# EAGLE board robot workshop pcb final (EAGLE 6.6.0)
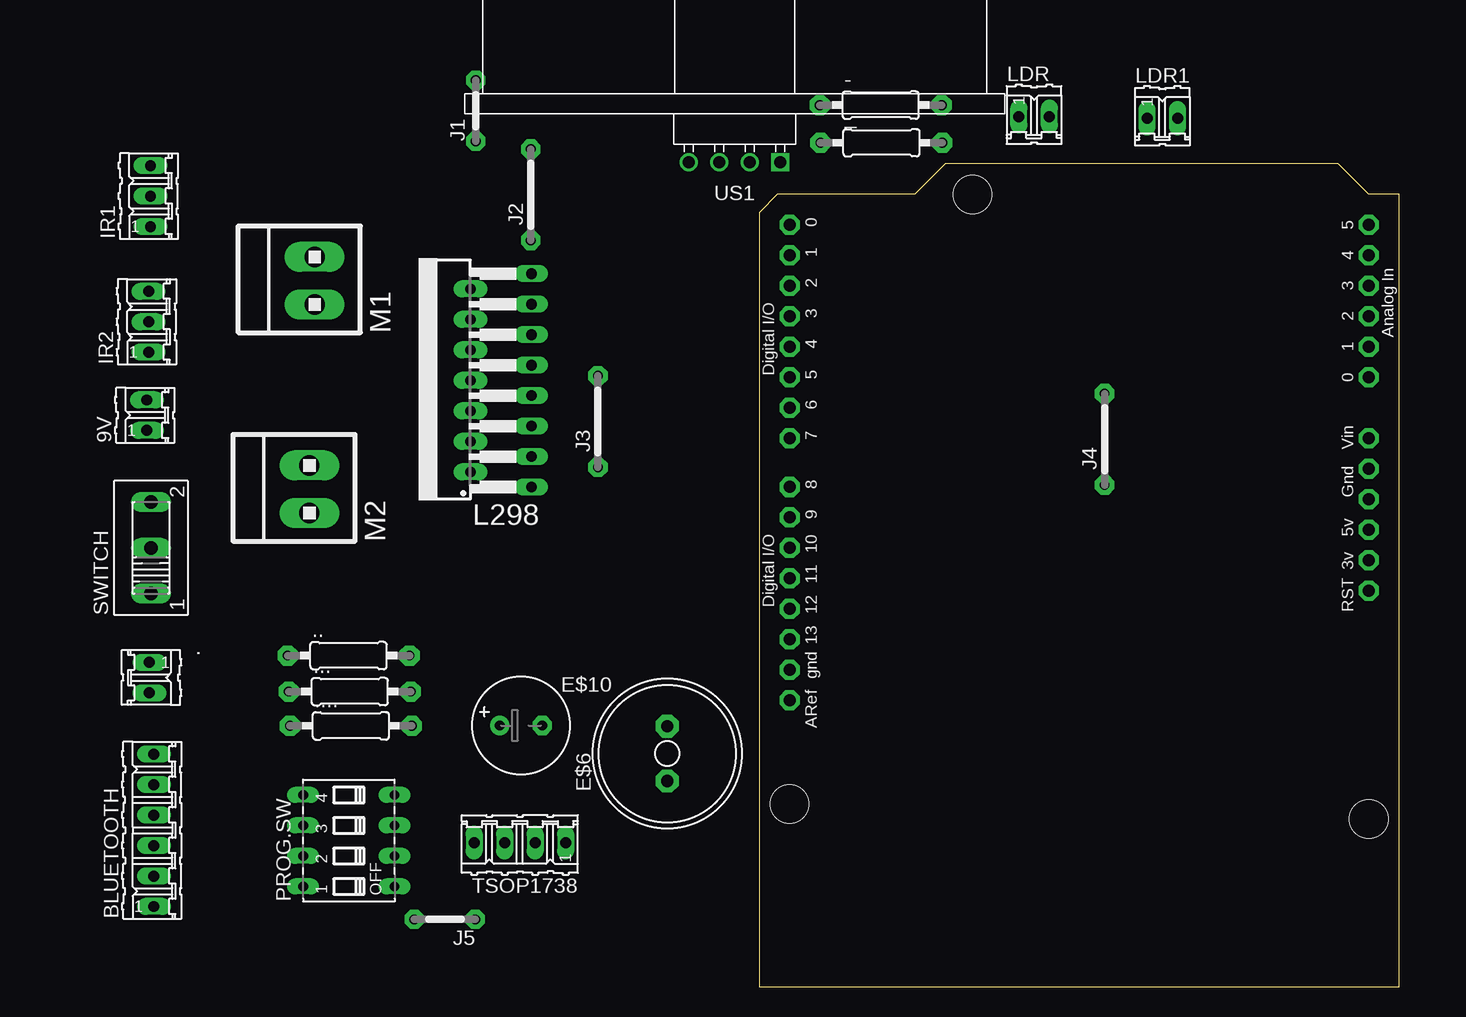
[diagram p0: board, top side]
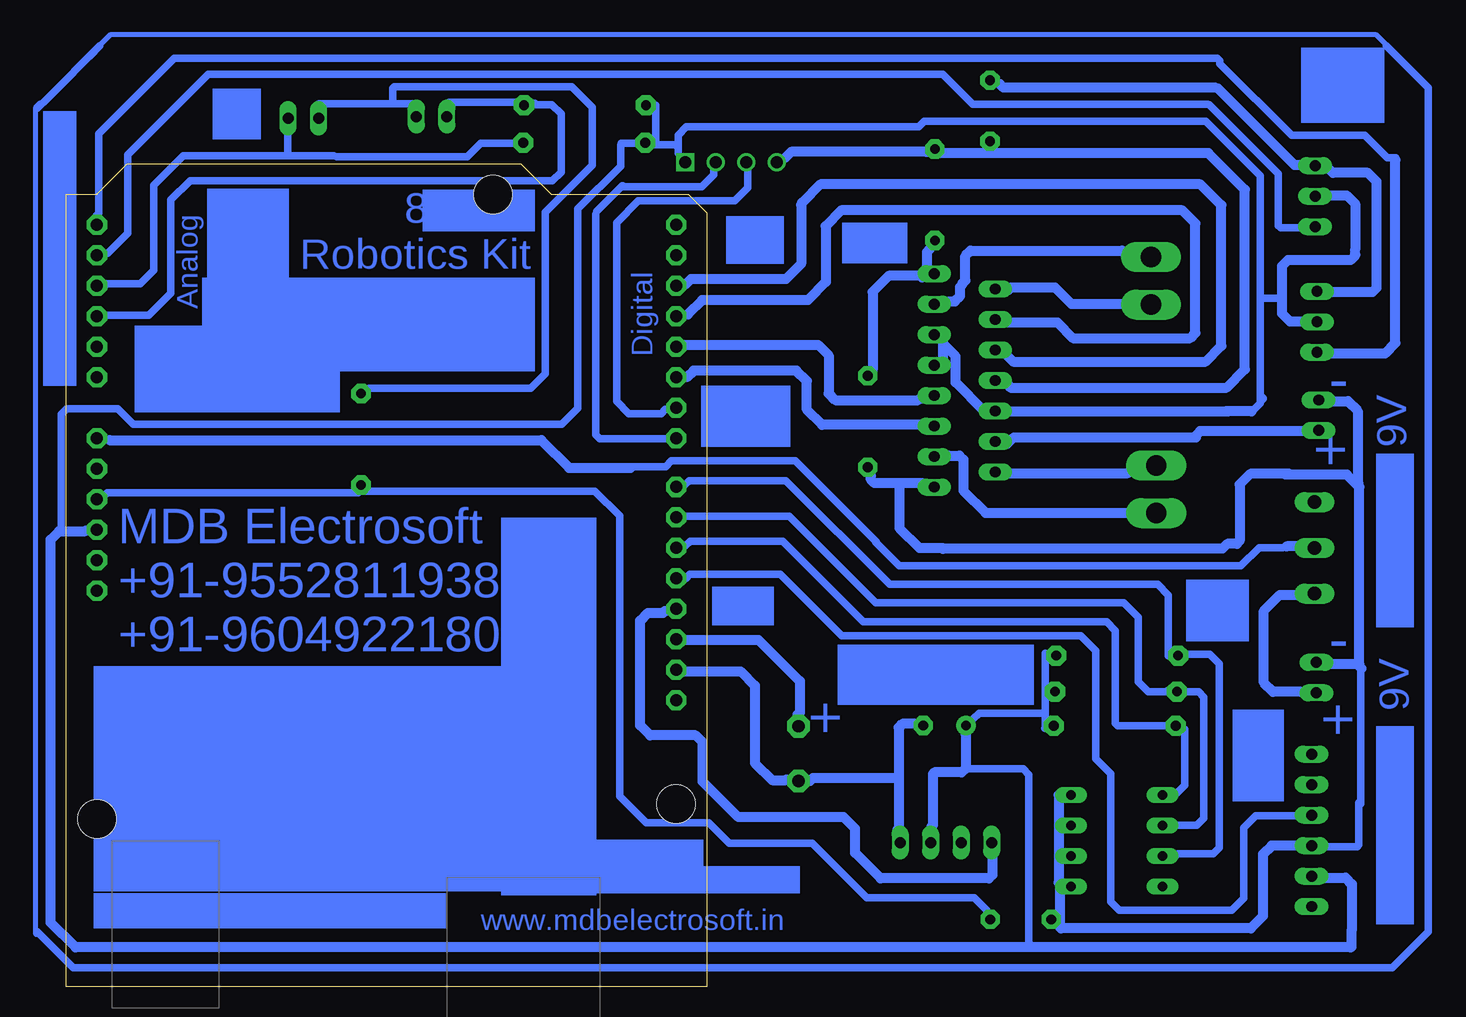
[diagram p1: board, bottom side, seen from below]

Size 53.34 x 68.58 mm. Coordinates in mm from the lower left corner, seen from the top.
Copper layers (1*16): Top 0.035mm / dielectric 1.5mm / Bottom 0.035mm
Design rules "default": minimum track width 10mil, minimum drill 24mil, track to track 8mil, track to pad 8mil, pad to pad 8mil, via to via 8mil, smd to smd 8mil, copper to edge 40mil, drill to drill 8mil, minimum pad ring 10mil, minimum via ring 8mil, stop-mask expansion 4mil, vias tented up to drill 0mil, thermal gap 10mil

## Footprints (pad centres in the part's own frame; a part is rotated, then mirrored left to right if it is on the bottom)
02P = drill 0.914 long: 1 -1.27,0; 2 1.27,0
0207/10 = drill 0.813 pad 1.676 octagon: 1 -5.08,0; 2 5.08,0
06P = drill 0.914 long: 1 -6.35,0; 2 -3.81,0; 3 -1.27,0; 4 1.27,0; 5 3.81,0; 6 6.35,0
ARDUINO = drill 1 pad 1.676 octagon: 3V 35.56,2.54; 5V 38.1,2.54; A0 50.8,2.54; A1 53.34,2.54; A2 55.88,2.54; A3 58.42,2.54; A4 60.96,2.54; A5 63.5,2.54; AREF 23.876,50.8; D0 63.5,50.8; D1 60.96,50.8; D2 58.42,50.8; D3 55.88,50.8; D4 53.34,50.8; D5 50.8,50.8; D6 48.26,50.8; D7 45.72,50.8; D8 41.656,50.8; D9 39.116,50.8; D10 36.576,50.8; D11 34.036,50.8; D12 31.496,50.8; D13 28.956,50.8; GND 26.416,50.8; GND1 43.18,2.54; GND2 40.64,2.54; RESET 33.02,2.54; VIN 45.72,2.54 | hole 3.2: 15.24,50.8; 66.04,35.56; 13.97,2.54
AL11P = drill 1.016 pad 1.905 octagon: + 2.286,0; - -2.286,0
E3,5-8 = drill 0.813 pad 1.6: + -1.778,0 | drill 0.813 pad 1.6 octagon: - 1.778,0
03P = drill 0.914 long: 1 -2.54,0; 2 0,0; 3 2.54,0
05 = drill 0.813 pad 1.6 octagon: 1 -2.54,0; 2 2.54,0
07 = drill 0.813 pad 1.6 octagon: 1 -3.81,0; 2 3.81,0
TA15A = drill 0.889 long: 1 -8.89,-6.35; 2 -7.62,-1.27; 3 -6.35,-6.35; 4 -5.08,-1.27; 5 -3.81,-6.35; 6 -2.54,-1.27; 7 -1.27,-6.35; 8 0,-1.27; 9 1.27,-6.35; 10 2.54,-1.27; 11 3.81,-6.35; 12 5.08,-1.27; 13 6.35,-6.35; 14 7.62,-1.27; 15 8.89,-6.35
1X2MTA = drill 1.676 long: 1 1.981,0; 2 -1.981,0
DIP04S = drill 0.813 long: 1 -3.81,-3.81; 2 -1.27,-3.81; 3 1.27,-3.81; 4 3.81,-3.81; 5 3.81,3.81; 6 1.27,3.81; 7 -1.27,3.81; 8 -3.81,3.81
255SB = drill 1.118 long: 1 -3.81,0; 2 0,0; 3 3.81,0
04P = drill 0.914 long: 1 -3.81,0; 2 -1.27,0; 3 1.27,0; 4 3.81,0
ULTRASONIC-HC-SR04#V = drill 1 square: 1 -3.81,0 | drill 1: 2 -1.27,0; 3 1.27,0; 4 3.81,0

## Placement (x,y rotation side)
9V  [02P]  -51.01,47.63 90 top  (outside the outline)
-  10k  [0207/10]  10.13,73.47 0 top  (outside the outline)
.  9V  [02P]  -50.82,25.78 270 top  (outside the outline)
..  10k  [0207/10]  -34.21,27.61 0 top  (outside the outline)
...  10k  [0207/10]  -34.12,24.6 0 top  (outside the outline)
....  10k  [0207/10]  -34.02,21.75 0 top  (outside the outline)
_  10k  [0207/10]  10.19,70.34 0 top
BLUETOOTH  [06P]  -50.43,13.04 90 top  (outside the outline)
E$1  [ARDUINO]  53.34,0 90 top
E$6  Buzzer  [AL11P]  -7.66,19.44 90 top  (outside the outline)
E$10  1000uf  [E3,5-8]  -19.84,21.78 0 top  (outside the outline)
IR1  [03P]  -50.72,65.89 90 top  (outside the outline)
IR2  [03P]  -50.87,55.42 90 top  (outside the outline)
J1  [05]  -23.62,73.01 90 top  (outside the outline)
J2  [07]  -19.03,66.01 90 top  (outside the outline)
J3  [07]  -13.43,47.1 90 top  (outside the outline)
J4  [07]  28.79,45.63 90 top
J5  [05]  -26.19,5.62 180 top  (outside the outline)
L298  [TA15A]  -25.33,50.53 90 top  (outside the outline)
LDR  [02P]  22.91,72.51 0 top  (outside the outline)
LDR1  [02P]  33.6,72.38 0 top  (outside the outline)
M1  [1X2MTA]  -37.04,58.84 90 top  (outside the outline)
M2  [1X2MTA]  -37.47,41.47 90 top  (outside the outline)
PROG.SW  [DIP04S]  -34.19,12.18 90 top  (outside the outline)
SWITCH  [255SB]  -50.67,36.58 90 top  (outside the outline)
TSOP1738  [04P]  -19.94,12.03 180 top  (outside the outline)
US1  [ULTRASONIC-HC-SR04#V]  -2.04,68.71 180 top

## Library data of the parts
9V . BLUETOOTH IR1 IR2 LDR LDR1 TSOP1738 = con-amp-quick
- .. ... .... _ E$1 = adafruit
E$6 = buzzer
E$10 = rcl
J1-J5 = jumper
L298 = ref-packages
M1 M2 = con-amp
PROG.SW = switch-dil
SWITCH = switch
US1 = diy-modules

## Tracks (layer width: path | path; a pad name or v marks a point on that pad's centre or on a via)
S$1
  Bottom 0.813: -7.88,65.17 -7.88,60.24 -6.61,58.98 1.31,58.98 1.71,58.58
S$2
  Bottom 0.813: -9.94,63.26 -9.94,58.74 -8.43,57.23 0.36,57.23 1.55,56.04
S$3
  Bottom 0.813: 1.79,53.5 -9.31,53.5 -10.18,52.63 -10.18,49.46 -10.73,48.9 -17.63,48.9 -18.18,49.46
S$4
  Bottom 0.813: -18.03,46.84 -9.62,46.84 -8.36,48.11 -8.36,50.49 -7.48,51.36 1.08,51.36 1.63,50.8
S$5
  Bottom 0.813: -20.16,44.27 -21.06,44.27 -21.4,43.93 -21.4,41.35 -23.26,39.5 -35.59,39.5
S$6
  Bottom 0.813: -36.17,43.64 -36.39,43.64
S$7
  Bottom 0.813: -25.14,42.81 -35.11,42.81 -35.67,43.37
S$8
  Bottom 0.813: -20.19,57.12 -20.68,57.12 -21.12,57.56 -21.12,58.33 -21.34,58.55 -21.34,58.66 -21.56,58.88 -21.56,60.91 -22.01,61.35 -34.61,61.35 -35.1,60.86
S$9
  Bottom 0.813: -35.05,56.9 -30.42,56.9 -29.05,58.27 -25.36,58.27 -25.14,58.05
S$10
  Bottom 0.61: -39.86,21.46 -39.86,16.82 -39.17,16.12
S$11
  Bottom 0.61: 6.96,66.74 7.05,66.74 9.15,64.64
S$12
  Bottom 0.61: -3.42,67.97 -3.42,66.57 -2.34,65.5 5.69,65.5 7.5,63.69 7.5,48.78 6.47,47.75 3.79,47.75 3.42,48.12
S$13
  Bottom 0.813: -24.67,55.36 -29.23,55.36 -30.53,54.06 -40.3,54.06 -40.73,54.5 -40.73,63.62 -39.64,64.7 -11.22,64.7 -9.91,63.4
S$14
  Bottom 0.813: -19.68,54.5 -19.68,51.89
S$15
  Bottom 0.813: -23.15,47.98 -20.76,50.37 -20.76,52.54 -19.9,53.41 | -19.9,53.41
S$16
  Bottom 0.61: 55.77,4.6 52.78,1.61 -57.16,1.61 -60.15,4.6 -60.15,74.92 -56.65,78.42
S$17
  Bottom 0.813: -18.32,69.59 -7.05,69.59 -6.59,69.13
S$18
  Bottom 0.813: -18.11,41.82 -17.96,41.97 -13.99,41.97 -13.69,42.26 -13.69,42.56
S$19
  Bottom 0.61: -40.06,24.58 -41,24.58 -41.44,24.13 -41.44,14.05 -40.85,13.45 -39.12,13.45 -39.07,13.5
S$20
  Bottom 0.61: 29.02,41.18 49.95,41.18 50.17,40.97
S$21
  Bottom 0.813: -24.89,52.76 -25.54,52.11 -41.6,52.11 -42.9,53.41 -42.9,65.14 -41.16,66.87 -9.48,66.87 -7.96,65.36
S$22
  Bottom 0.813: -25.1,50.15 -25.32,49.94 -43.33,49.94 -44.85,51.45 -44.85,66.44 -41.81,69.48 -19.46,69.48
S$23
  Bottom 0.813: -18.16,59.71 -18.38,59.92 -18.38,61.23 -18.59,61.44 -18.59,61.45
S$24
  Bottom 0.813: -17.96,59.1 -17.82,59.25 -15.16,59.25 -13.84,57.92 -13.84,51.42
S$25
  Bottom 0.61: -39.91,27.69 -41.94,27.69 -42.73,26.9 -42.73,11.58 -42.23,11.08 -39.27,11.08 -39.07,10.88
S$26
  Bottom 0.61: -38.48,27.6 -38.48,32.64 -37.59,33.53 -15.25,33.53 -6.59,42.18 1.46,42.18 1.81,41.84
S$27
  Bottom 0.61: 1.91,39.21 -6.89,39.21 -14.11,32 -34.77,32 -35.96,30.81 -35.96,25.42 -36.8,24.58 -38.28,24.58 -38.38,24.68
S$28
  Bottom 0.61: -38.28,21.76 -34.28,21.76 -34.08,21.96 -34.08,29.67 -33.34,30.41 -13.07,30.41 -6.35,37.14 1.36,37.14 1.76,36.74
S$29
  Bottom 0.61: -28.23,27.78 -28.23,21.61 -28.17,21.55
S$30
  Bottom 0.813: -25.1,47.98 -43.55,47.98
S$31
  Bottom 0.61: -51.52,11.69 -54.23,11.69 -54.37,11.83 -54.37,15.32
S$32
  Bottom 0.406: -56.68,78.3 -56.68,78.47 -55.82,79.33 49.7,79.33 51.25,77.78
S$33
  Bottom 0.813: -25.04,45.22 -25.61,45.79 -40.78,45.79
S$34
  Bottom 0.61: -28.11,22.8 -22.72,22.8 -22.24,22.32
S$35
  Bottom 0.813: 1.72,28.91 -4.33,28.91 -7.77,25.47 -7.77,22.85 -7.59,22.68 -7.65,22.68
S$36
  Bottom 0.813: 49.77,45.55 13.77,45.55 11.45,43.24 6.34,43.24
S$37
  Bottom 0.813: -54.05,61.11 -54.05,60.94 -53.66,60.55 -48.45,60.55 -47.95,60.05 -47.95,56.12 -48.62,55.45 -49.73,55.45 -49.84,55.34
S$38
  Bottom 0.813: 1.72,26.3 -2.85,26.3 -4.03,25.11 -4.03,18.64 -5.46,17.22 -6.58,17.22 -6.64,17.28
S$39
  Bottom 0.813: -21.59,21.08 -21.59,18.23 -21.23,17.87 -18.98,17.87 -18.86,17.75 -18.86,13.48 -18.74,13.36
S$40
  Bottom 0.813: -17.38,21.91 -16.31,21.91 -16.01,21.61 -16.01,13.24 -15.89,13.13
S$41
  Bottom 0.813: -29.34,15.97 -29.34,8.68 -29.52,8.5
S$42
  Bottom 0.813: -51.53,9.09 -53.25,9.09 -53.79,8.56 -53.79,4.76 -53.73,4.7 -53.73,3.34 -53.67,3.28 52.59,3.28 54.66,5.35 54.66,37.27 53.95,37.98 51.76,37.98 51.7,38.04
S$43
  Bottom 0.813: -49.22,11.76 -47.08,11.76 -46.37,11.05 -46.37,5.89 -45.36,4.88 -29.52,4.88 -29.46,4.94 -29.46,8.14 -29.58,8.26
S$44
  Bottom 0.813: -15.82,17.4 -8.88,17.4 -8.64,17.16
S$45
  Bottom 0.813: -51.85,65.95 -53.35,65.95 -54.04,65.26 -54.04,61.41
S$46
  Bottom 0.61: 2.37,69.45 2.37,70.97 1.68,71.67 -17.68,71.67 -18.14,72.13 -41.6,72.13 -46.13,67.6 -46.13,48.61 -45.53,48.01
S$47
  Bottom 0.813: -51.96,57.91 -55.5,57.91 -55.85,58.25 -55.85,67.11 -55.12,67.84 -52.19,67.84 -51.92,68.11
S$48
  Bottom 0.813: -51.95,52.79 -56.55,52.79 -57.41,53.65 -57.41,68.91
S$49
  Bottom 0.813: -45.41,47.96 -43.22,47.96
S$50
  Bottom 0.61: -47.7,57.39 -46.32,57.39
S$51
  Bottom 0.61: -49.64,63.26 -47.84,63.26 -47.65,63.44 -47.65,67.74 -41.88,73.51
S$52
  Bottom 0.813: -49.56,68.48 -49.01,68.48 -42.63,74.86
S$53
  Bottom 0.813: -42.37,74.94 -24.73,74.94 -24.44,75.23
S$54
  Bottom 0.61: -57.43,69.11 -56.72,69.11 -54.87,70.96 -48.75,70.96 -42.77,76.94 -42.77,77.16 -42.55,77.37 44.36,77.37 50.63,71.1 50.63,64.48 50.84,64.26
S$55
  Bottom 0.813: -23.83,10.81 -23.83,9.33 -23.53,9.03 -14.51,9.03 -12.38,11.17 -12.38,13.18 -11.43,14.13 -2.65,14.13 0.32,17.1 0.32,20.36 0.91,20.96 4.71,20.96 5.54,21.79 5.54,30.51 4.89,31.16 3.64,31.16 3.46,31.34 3.46,31.28
S$56
  Bottom 0.813: -46.29,49.02 -46.24,48.96
S$57
  Bottom 0.813: -49.84,46.3 -41.14,46.3 -40.75,45.92
S$58
  Bottom 0.813: -16.07,41.96 -16.07,38.24 -17.73,36.57 -19.66,36.57 -19.72,36.51
S$59
  Bottom 0.813: -52.01,26.93 -54.17,26.93 -54.57,26.53
S$60
  Bottom 0.813: -48.26,42.68 -53.37,42.68 -54.41,41.64 -54.41,26.85
S$61
  Bottom 0.813: -48.58,42.76 -45.31,42.76 -44.43,41.88 -44.43,37.16 -44.19,36.92 -43.39,36.92 -42.99,36.52 -19.69,36.52
S$62
  Bottom 0.61: -48.03,36.6 -46.04,36.6 -44.52,35.07 -16.07,35.07 -14.08,37.06
S$63
  Bottom 0.61: -49.22,14.25 -45.78,14.25 -44.77,13.24 -44.77,7.37 -43.76,6.36 -34.39,6.36 -33.67,7.07 -33.67,17.75 -32.43,19 -32.43,28.02 -31.18,29.26 -11.25,29.26 -6.15,34.36 1.39,34.36 1.68,34.07
S$64
  Bottom 0.813: -49.55,24.57 -47.22,24.57 -46.45,25.35 -46.45,31.33 -47.78,32.67 -49.5,32.67 -49.55,32.72
S$65
  Bottom 0.61: 6.12,43.36 3.39,43.36 2.93,43.82 -7.39,43.82 -14.12,37.08
S$66
  Bottom 0.61: -21.69,18.17 -26.38,18.17 -26.85,17.69 -26.85,3.75 -26.91,3.69
S$67
  Bottom 0.813: -49.2,36.7 -48.34,36.7
S$68
  Bottom 0.61: -54.51,26.57 -54.51,15.25
S$69
  Bottom 0.61: -41.75,73.54 -22.18,73.54 -19.69,76.03 41.51,76.03 48.22,69.32 48.22,62.79 49.88,61.13
S$70
  Bottom 0.61: 4.24,73.48 4.24,70.28 4.35,70.16 2.57,70.16 2.52,70.1
S$71
  Bottom 0.61: 15.98,73.7 21.44,73.7 21.56,73.58
S$72
  Bottom 0.61: 16.16,70.32 18.83,70.32 19.96,69.19 30.81,69.19
S$73
  Bottom 0.61: 31.05,69.25 43.63,69.25 46.06,66.82 46.06,59.7 47.19,58.57 49.98,58.57 50.15,58.39
S$74
  Bottom 0.61: 49.98,55.96 46.48,55.96 44.64,57.8 44.64,65.57 43.04,67.17 12.84,67.17 12.13,67.88 12.13,72.75 12.9,73.52 14.2,73.52 14.32,73.64
S$75
  Bottom 0.61: 34.91,71.5 34.91,69.43 34.85,69.37
S$76
  Bottom 0.813: -52.09,48.8 -53.45,48.8 -54.25,48 -54.25,42.01 -54.33,41.93
S$77
  Bottom 0.61: 32.3,73.58 24.41,73.58 24.11,73.28
S$78
  Bottom 0.61: 14.02,46.88 47.77,46.88 49.06,48.16 53.33,48.16 53.76,47.73 53.76,38.19 53.97,37.97
S$79
  Bottom 0.61: 6.04,70.32 7.11,70.32
S$80
  Bottom 0.61: 7.16,70.17 7.16,68.39 10.72,64.83 10.72,48.23 12.07,46.88 14.64,46.88
S$81
  Bottom 0.61: 26.17,73.67 26.17,74.88 26.03,75.02 11.22,75.02 9.51,73.31 9.51,68.46 13.42,64.55 13.42,51.08 14.64,49.87 28.09,49.87 28.31,49.66
S$82
  Bottom 0.61: 29.29,41.3 9.3,41.3 7.25,39.24 7.25,15.89 5.03,13.67 -0.18,13.67 -1.89,11.96 -8.8,11.96 -13.34,7.42 -22.31,7.42 -23.33,6.4
S$83
  Bottom 0.61: 3.3,45.69 8.9,45.69 9.23,46.02 9.23,64.39
S$84
  Bottom 0.61: -0.61,68.06 -0.61,67.69 0.42,66.66 6.96,66.66
S$85
  Bottom 0.61: 55.77,73.2 54.92,74.06 50.55,78.42 50.56,78.42 51.41,77.56
S$86
  Bottom 0.406: 55.88,4.37 55.88,73.31 55.54,73.66
(copper drawn outside any net)
  shapes: Bottom area x21

## Text on the board
Bottom: 8 IN 1 / Robotics Kit | Analog | Digital | 9V | - | + | MDB Electrosoft / +91-9552811938 / +91-9604922180 | 9V | - | + | + | www.mdbelectrosoft.in